# Altium PCB PCB.PcbDoc
Units mm, origin at the board's own origin, x right, y up, seen from the top; angles counter-clockwise.
Board outline 27.3 x 14 mm, 2 copper layers (Top Layer, Bottom Layer), stack 1.571 mm thick; 8 components, 12 nets, 41 pads, 7 vias.
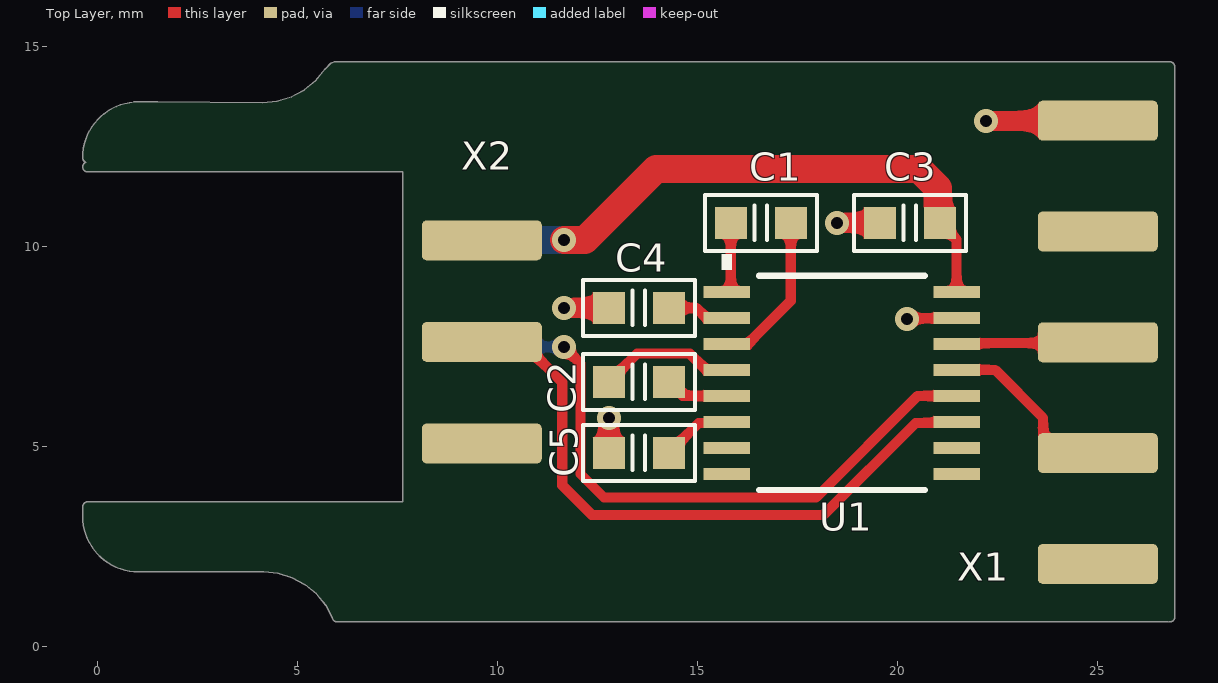
[diagram p0: Top Layer view]
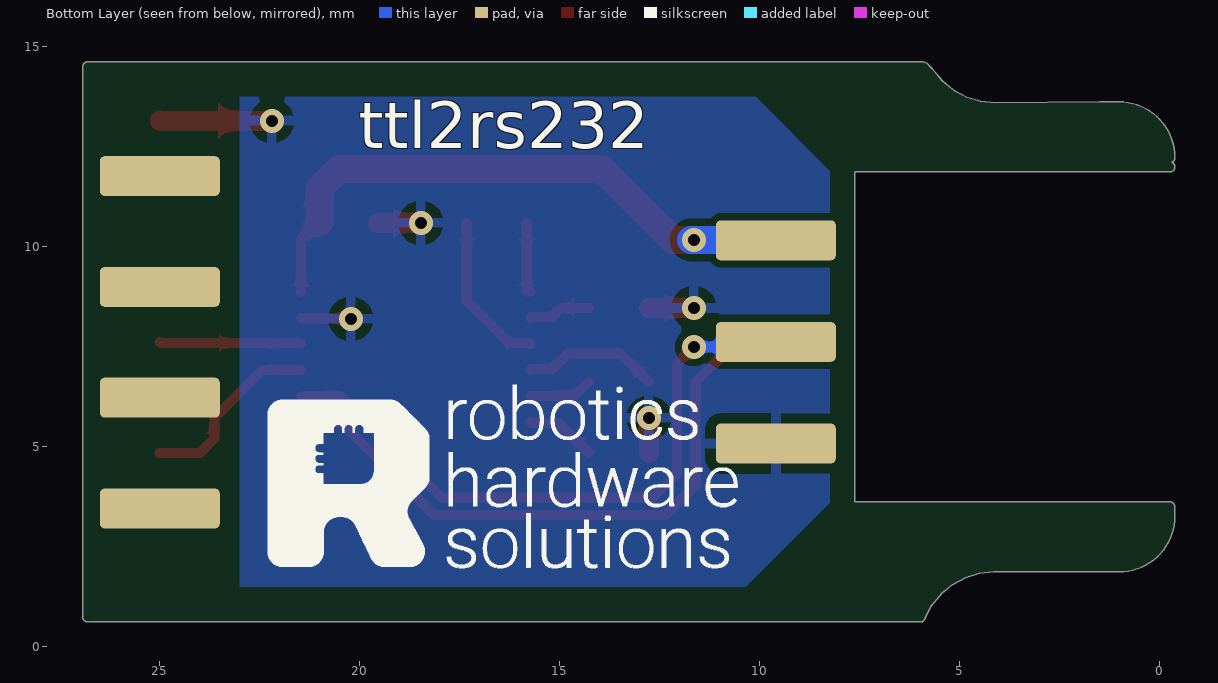
[diagram p1: Bottom Layer view, seen from below]

## Layer stack, top to bottom
Top Solder: solder mask 0.0102, Solder Resist, Dk 3.5
Top Layer: signal copper 0.0356
Dielectric 1: dielectric 1.5, FR-4, Dk 4.8
Bottom Layer: signal copper 0.0356
Bottom Solder: solder mask 0.0102, Solder Resist, Dk 3.5

## Board outline
-0.377,3.27 ccw(c1.02,3.27) 1.02,1.873 4.141,1.873 4.15,1.873 4.506,1.838 4.857,1.731 5.181,1.558 5.465,1.326 5.698,1.042 5.863,0.733 ccw(c5.989,0.75) 5.989,0.623 26.75,0.623 26.775,0.625 ccw(c26.8,0.75) 26.927,0.75 26.927,14.5 ccw(c26.8,14.5) 26.8,14.627 5.913,14.627 5.823,14.59 5.689,14.456 5.68,14.446 5.44,14.153 5.156,13.92 4.833,13.747 4.481,13.641 4.11,13.604 1.501,13.627 1.5,13.627 1.02,13.627 ccw(c1.02,12.23) -0.377,12.23 ccw(c-0.25,12.23) -0.305,12.115 ccw(c-0.25,12) -0.25,11.873 7.623,11.873 7.623,3.627 -0.25,3.627 ccw(c-0.25,3.5) -0.377,3.5

## Design rules (kind name [scope] priority, off if disabled: settings)
Clearance [All] p1: gap=0.18 ignorepadtopadclearanceinfootprint=FALSE
DiffPairsRouting [All] p1: maxlimit=0.254 minlimit=0.254 mostfreqgap=0.254 toplayer_minwidth=0.254 toplayer_maxwidth=0.381 toplayer_prefwidth=0.381 bottomlayer_minwidth=0.254 bottomlayer_maxwidth=0.381 bottomlayer_prefwidth=0.381 maxuncoupledlength=12.7
PolygonConnect [All] p1: connectstyle=Relief reliefconductorwidth=0.254 reliefentries=4 polygonreliefangle="90 Angle" airgapwidth=0.254
RoutingVias [All] p1: holewidth=0.3 width=0.6 viastyle="Through Hole" minholewidth=0.3 minwidth=0.6 maxholewidth=2 maxwidth=4
SolderMaskExpansion [All] p1: expansion=0.102 istentingtop=FALSE
Width [All] p1: maxlimit=2 minlimit=0.254 preferedwidth=0.254
29 further rules are at their usual default settings.

## Components (designator, comment, footprint, x,y, rotation, side; value= is the part's Value field where it differs from the comment)
C1 "0.1uF" C_0603 16.575,10.6 r0 top
C2 "0.1uF" C_0603 13.525,6.625 r0 top
C3 "0.1uF" C_0603 20.3,10.6 r0 top
C4 "0.1uF" C_0603 13.525,8.475 r0 top
C5 "0.1uF" C_0603 13.525,4.85 r0 top
U1 "ST232CTR" TSSOP16_STM 18.6,6.6 r0 top
X1 "DB9" DB9_template 25,7.61 r90 top
X2 "PBD-6" PBD-6-sideways 9.975,5.085 r90 top

## Footprints (in the part's own frame and the unit in brackets; to place one, negate y for a bottom-side part, rotate by r counter-clockwise, add the part's x,y. Pads: shape width x height; smd on the part's side, far side on the other; paste and mask are expansions set on the pad)
C_0603 [mm] "Chip Capacitor; Body 1.6 x 0.8 mm (LxW typ)"
  rect 0.8x0.8 smd: 1(-0.75,0) 2(0.75,0)
  silkscreen extent -1.4,-0.7 1.4,0.7, body extent -0.8,-0.4 0.8,0.4, height 0.3
DB9_template [mm]
  rrect25% 1x3 smd: 1(-5.535,0) 2(-2.765,0) 3(0.005,0) 4(2.775,0) 5(5.545,0)
  rrect25% 1x3 smd far side: 6(-4.15,0) 7(-1.38,0) 8(1.39,0) 9(4.16,0)
  body extent -14.97,-14.1 15.03,1.2, height 5.75
PBD-6-sideways [mm] "Connector; Header; 3x2 Position"
  rrect25% 1x3 smd: 1(0,0.375) 3(2.54,0.375) 5(5.08,0.375)
  rrect25% 1x3 smd far side: 2(0,0.375) 4(2.54,0.375) 6(5.08,0.375)
  body extent -1.17,-1.25 6.52,10.4, height 1.97
TSSOP16_STM [mm]
  rect 1.162x0.305 smd paste+0 mask+0: 1(-2.871,2.275) 2(-2.871,1.625) 3(-2.871,0.975) 4(-2.871,0.325) 5(-2.871,-0.325) 6(-2.871,-0.975) 7(-2.871,-1.625) 8(-2.871,-2.275) 9(2.871,-2.275) 10(2.871,-1.625) 11(2.871,-0.975) 12(2.871,-0.325) 13(2.871,0.325) 14(2.871,0.975) 15(2.871,1.625) 16(2.871,2.275)
  silkscreen extent -3,-2.68 2.07,3.22, body extent -3.3,-2.55 3.3,2.55, height 1.2

## Part data
C1 C2 C3 C4 C5: library part C0603, "Capacitor", Part Number=CC0603KPX7R9BB104
U1: "No Description Available", Mfr_Name=STMicroelectronics, Copyright="Copyright (C) 2022 Ultra Librarian. All rights reserved.", Part Number=ST232CTR, RefDes=RefDes, Type=DEV
X1: library part DB9_template, "Connector"
X2: "Header, 6-Pin, Dual row", Part Number=PBD-6

## Via types
v1: diameter 0.6, hole 0.3, Top Layer to Bottom Layer, tented both sides, 7 vias

## Nets (pads, with @x,y where several pads share a name; then routed paths per layer and width w, separated by ;. In a path a pad name is that pad's centre, name@x,y a point inside that pad or via, vN(x,y) a via of type N, cw(c..) or ccw(c..) an arc to the next point about the centre after c; other vN are vias at no path point)
GND: C3.1 C4.1 C5.1 U1.15 X1.5 X2.2 | length 7.1
  Top Layer w0.254: v1(20.225,8.2) 20.237,8.212 21.458,8.212 U1.15
  Top Layer w0.5: v1(11.65,8.475) C4.1 ; C5.1 v1(12.775,5.725) ; v1(18.475,10.6) C3.1 ; v1(22.2,13.15) 22.202,13.152 24.998,13.152 X1.5
NetC1_1: C1.1 U1.1 | length 1.8
  Top Layer w0.254: U1.1 15.8,8.875 15.825,8.9 C1.1
NetC1_2: C1.2 U1.3 | length 4
  Top Layer w0.254: U1.3 15.754,7.6 16.272,7.6 17.325,8.653 C1.2
NetC2_1: C2.1 U1.4 | length 3.4
  Top Layer w0.254: C2.1 13.482,7.332 14.802,7.332 15.184,6.95 15.704,6.95 U1.4
NetC2_2: C2.2 U1.5 | length 1.6
  Top Layer w0.254: C2.2 14.625,6.275 U1.5
NetC4_2: C4.2 U1.2 | length 1.6
  Top Layer w0.254: C4.2 14.961,8.475 15.186,8.25 15.704,8.25 U1.2
NetC5_2: C5.2 U1.6 | length 1.8
  Top Layer w0.254: C5.2 15.025,5.6 15.704,5.6 U1.6
RX: U1.13 X1.2 | length 4.7
  Top Layer w0.254: U1.13 22.433,6.925 23.632,5.726 23.632,5.218 24.005,4.845 X1.2
RXD: U1.12 X2.4 | length 16.2
  Top Layer w0.254: v1(11.65,7.5) 12.068,7.082 12.068,4.323 12.657,3.734 17.959,3.734 20.5,6.275 U1.12
  Bottom Layer w0.254: X2.4 9.725,7.5 v1(11.65,7.5)
TX: U1.14 X1.3 | length 3.5
  Top Layer w0.254: U1.14 21.491,7.595 24.98,7.595 X1.3
TXD: U1.11 X2.3 | length 16.1
  Top Layer w0.254: X2.3 10.6,7.625 11.61,6.615 11.61,4.04 12.35,3.3 18.15,3.3 20.45,5.6 21.446,5.6 U1.11
VCC5V: C3.2 U1.16 X2.6 | length 15.2
  Top Layer w0.254: C3.2 21.471,10.179 U1.16
  Top Layer w0.7: v1(11.65,10.175) 12.175,10.175 13.95,11.95 20.525,11.95 21,11.475 21,10.65 C3.2
  Bottom Layer w0.7: X2.6 9.735,10.165 9.775,10.125 9.825,10.175 v1(11.65,10.175) v1@11.725,10.175
pads on no net: U1.7 U1.8 U1.9 U1.10 X1.1 X1.4 X1.6 X1.7 X1.8 X1.9 X2.1 X2.5

## Polygon pours and split planes (outlines as drawn)
GND on Bottom Layer "NONET_L-01_P-001" (solid, pour order 0): 10.103,13.75 23,13.75 23,1.5 10.353,1.5 8.25,3.603 8.25,11.897

## Silkscreen, mask and mechanical layers (free items; w line width, h text height)
Bottom Overlay:
  drawing of 28 lines, arcs and shapes, not listed
  text "ttl2rs232" at 20.024,12.082 h2
Board:
  lines w0.254: -0.25,12 7.75,12 7.75,3.5 -0.25,3.5 -0.25,3.27 ccw(c1.02,3.27) 1.02,2 1.5,2 4.141,2 ; -0.25,12.23 cw(c1.02,12.23) 1.02,13.5 1.5,13.5 4.116,13.477 4.506,13.515 4.881,13.629 5.227,13.814 5.53,14.063 5.779,14.366 5.913,14.5 26.8,14.5 26.8,0.75 ; 4.141,2.002 4.531,1.963 4.906,1.85 5.252,1.665 5.555,1.416 5.804,1.113 5.989,0.767 ; 5.989,0.75 26.75,0.75